# Altium PCB board.PcbDoc
Units mil, origin at the board's own origin, x right, y up, seen from the top; angles counter-clockwise.
Board outline 2240 x 2705 mil, 2 copper layers (Top Layer, Bottom Layer); 2 components, 24 nets, 86 pads, 22 vias.
Unrouted connection lines stored in the file: 30.
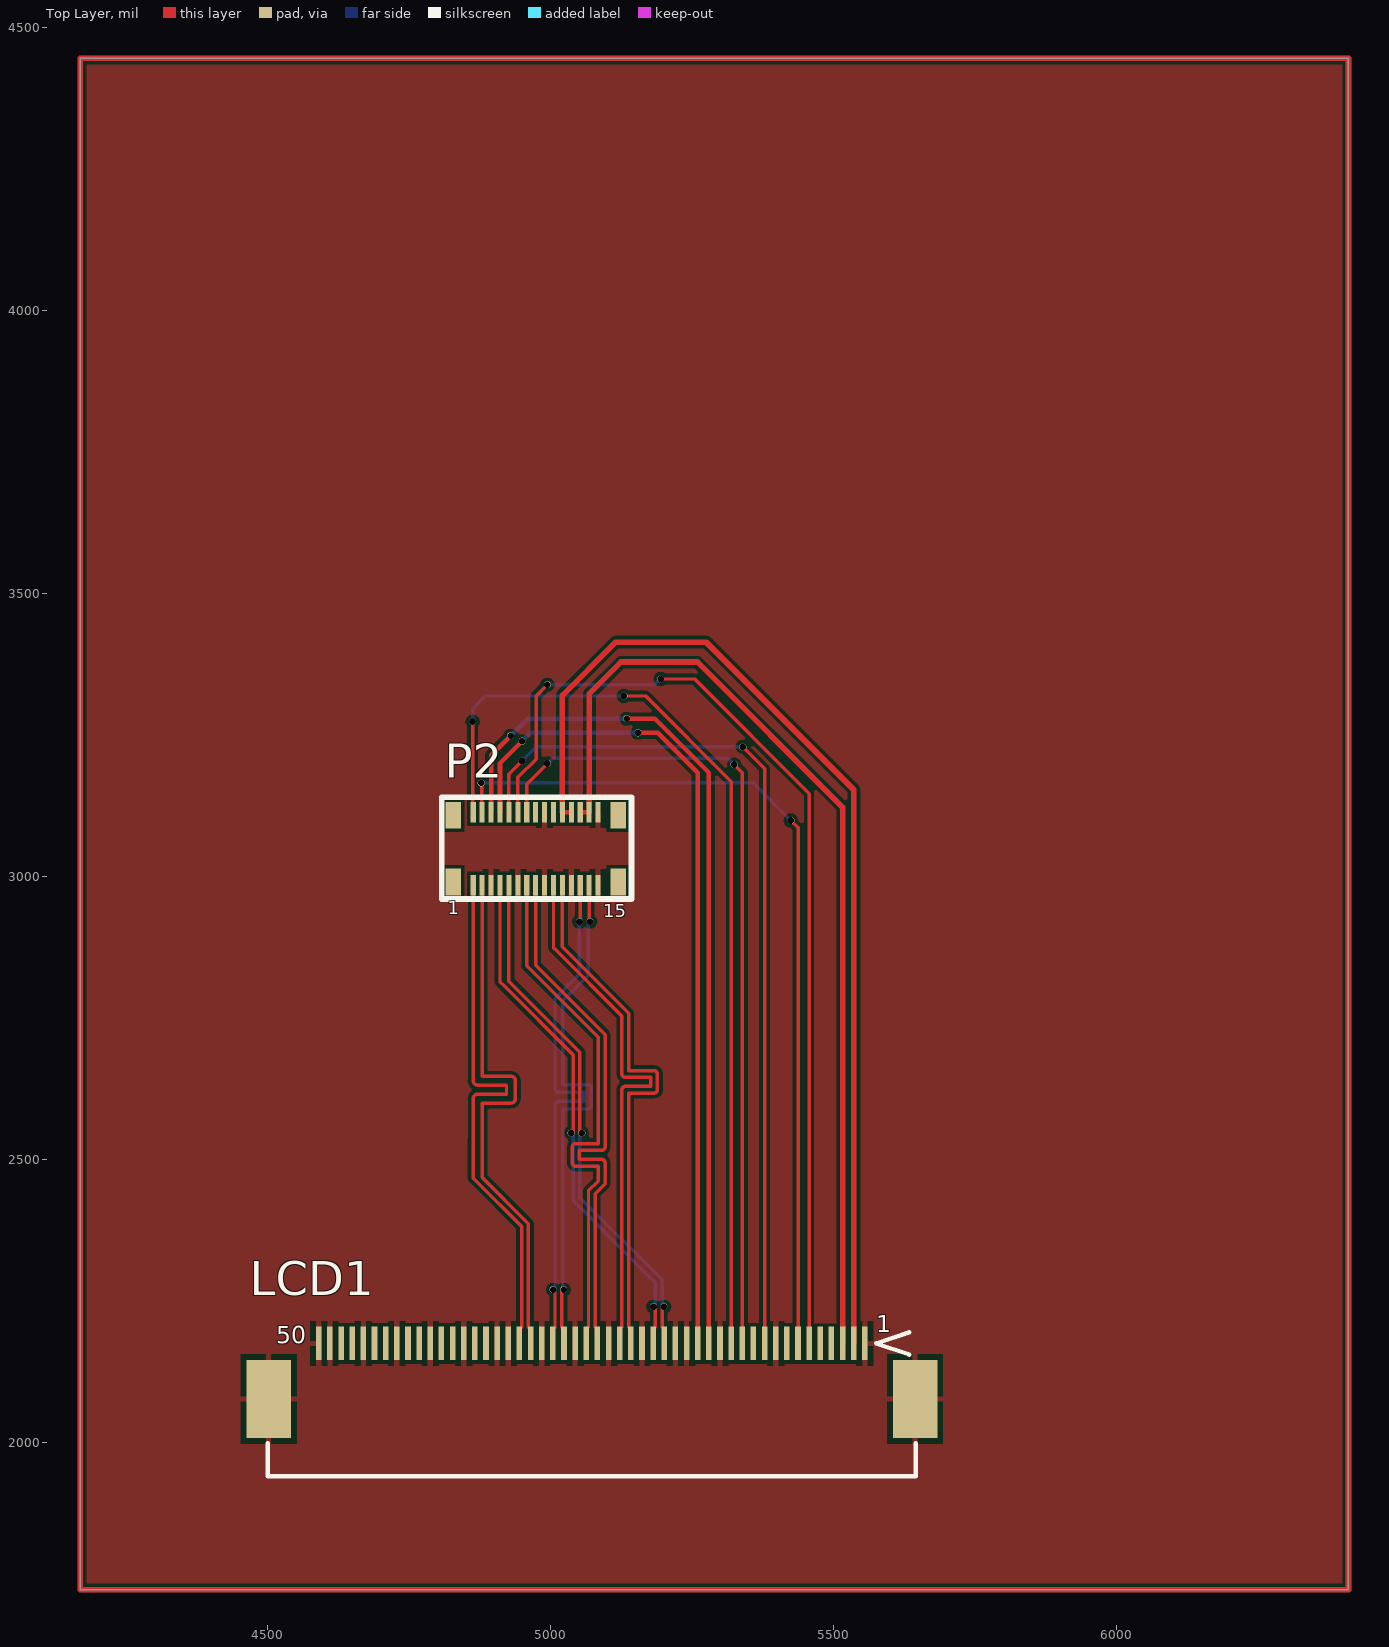
[diagram p0: Top Layer view]
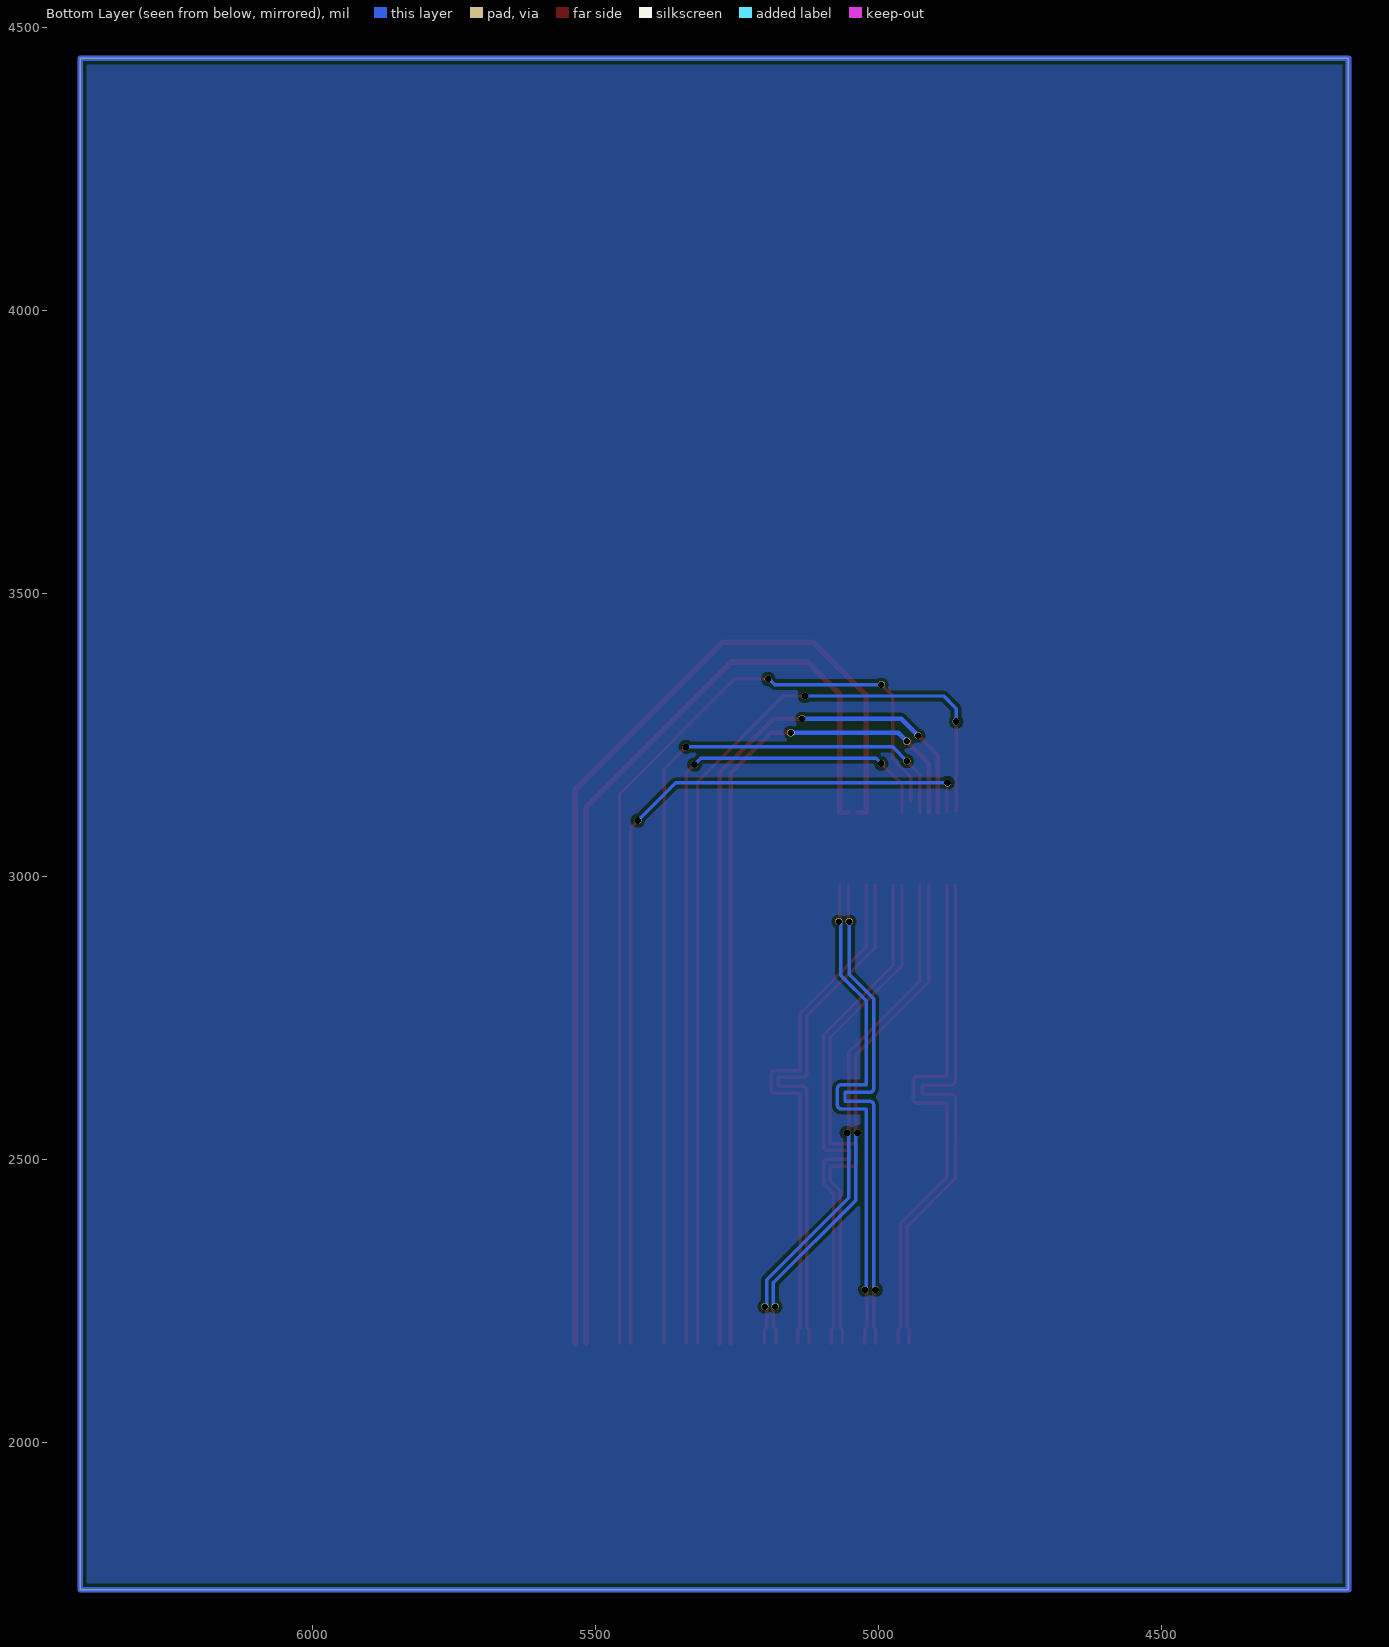
[diagram p1: Bottom Layer view, seen from below]

## Layer stack, top to bottom
Top Solder: solder mask 0.4, Solder Resist, Dk 3.5
Top Layer: signal copper 1.4
Dielectric 1: dielectric 12.6, FR-4, Dk 4.8
Bottom Layer: signal copper 1.4
Bottom Solder: solder mask 0.4, Solder Resist, Dk 3.5

## Board outline
4170,1740 4170,4445 6410,4445 6410,1740

## Design rules (kind name [scope] priority, off if disabled: settings)
Clearance [All] p1: gap=6 ignorepadtopadclearanceinfootprint=FALSE
DiffPairsRouting DiffPairsRouting_1 [InDifferentialPair ('MIPI_CLK')] p1: maxlimit=10 minlimit=6 mostfreqgap=6 toplayer_minwidth=6 toplayer_maxwidth=15 toplayer_prefwidth=6 bottomlayer_minwidth=6 bottomlayer_maxwidth=15 bottomlayer_prefwidth=6 maxuncoupledlength=500
DiffPairsRouting [All] p2: maxlimit=10 minlimit=6 mostfreqgap=6 toplayer_minwidth=6 toplayer_maxwidth=15 toplayer_prefwidth=6 bottomlayer_minwidth=6 bottomlayer_maxwidth=15 bottomlayer_prefwidth=6 maxuncoupledlength=500
HoleToHoleClearance [All] p1: gap=6 allowstackedmicrovias=TRUE
MatchedLengths [InDifferentialPair ('MIPI_CLK')] p1: tolerance=1000 checknetsindiffpair=FALSE checkdiffpairvsdiffpair=TRUE checkxsignals=TRUE checkothers=TRUE
MinimumSolderMaskSliver [All] p1: minsoldermaskwidth=0
PolygonConnect [All] p1: connectstyle=Relief reliefconductorwidth=10 reliefentries=4 polygonreliefangle="90 Angle" airgapwidth=10
RoutingVias [All] p1: holewidth=11.81 width=12.6 viastyle="Through Hole" minholewidth=11.81 minwidth=12.6 maxholewidth=13.78 maxwidth=13.78
SilkToSilkClearance [All] p1: silktosilkclearance=0
SilkToSolderMaskClearance [IsPad] p1: minsilkscreentomaskgap=0 clearancetoexposedcopper=TRUE
SolderMaskExpansion [All] p1: expansion=4
Width [All] p1: maxlimit=10 minlimit=6 preferedwidth=6
25 further rules are at their usual default settings.

## Classes and differential pairs
differential pair MIPI_D1: +MIPI_D1_P -MIPI_D1_N
differential pair MIPI_D2: +MIPI_D2_P -MIPI_D2_N
differential pair MIPI_D3: +MIPI_D3_P -MIPI_D3_N
differential pair MIPI_D0: +MIPI_D0_P -MIPI_D0_N
differential pair MIPI_CLK: +MIPI_CLK_P -MIPI_CLK_N

## Components (designator, comment, footprint, x,y, rotation, side; value= is the part's Value field where it differs from the comment)
LCD1 "AT070TN92" FPC-TOP50 5555.87,2175 r180 top
P2 "Header 15X2A" FPC30-0.3 4828.66,2990 r0 top

## Footprints (in the part's own frame and the unit in brackets; to place one, negate y for a bottom-side part, rotate by r counter-clockwise, add the part's x,y. Pads: shape width x height; smd on the part's side, far side on the other; paste and mask are expansions set on the pad)
FPC30-0.3 [mm]
  rect 0.7x1.2 smd: 0(0,0) 0(0,3) 0(7.4,0) 0(7.4,3)
  rect 0.23x0.92 smd: 1(0.9,-0.14) 2(1.3,-0.14) 3(1.7,-0.14) 4(2.1,-0.14) 5(2.5,-0.14) 6(2.9,-0.14) 7(3.3,-0.14) 8(3.7,-0.14) 9(4.1,-0.14) 10(4.5,-0.14) 11(4.9,-0.14) 12(5.3,-0.14) 13(5.7,-0.14) 14(6.1,-0.14) 15(6.5,-0.14) 16(6.5,3.14) 17(6.1,3.14) 18(5.7,3.14) 19(5.3,3.14) 20(4.9,3.14) 21(4.5,3.14) 22(4.1,3.14) 23(3.7,3.14) 24(3.3,3.14) 25(2.9,3.14) 26(2.5,3.14) 27(2.1,3.14) 28(1.7,3.14) 29(1.3,3.14) 30(0.9,3.14)
  silkscreen extent -0.51,-0.76 8,3.81
FPC-TOP50 [mm]
  rect 0.25x1.5 smd: 1(0,0) 2(0.5,0) 3(1,0) 4(1.5,0) 5(2,0) 6(2.5,0) 7(3,0) 8(3.5,0) 9(4,0) 10(4.5,0) 11(5,0) 12(5.5,0) 13(6,0) 14(6.5,0) 15(7,0) 16(7.5,0) 17(8,0) 18(8.5,0) 19(9,0) 20(9.5,0) 21(10,0) 22(10.5,0) 23(11,0) 24(11.5,0) 25(12,0) 26(12.5,0) 27(13,0) 28(13.5,0) 29(14,0) 30(14.5,0) 31(15,0) 32(15.5,0) 33(16,0) 34(16.5,0) 35(17,0) 36(17.5,0) 37(18,0) 38(18.5,0) 39(19,0) 40(19.5,0) 41(20,0) 42(20.5,0) 43(21,0) 44(21.5,0) 45(22,0) 46(22.5,0) 47(23,0) 48(23.5,0) 49(24,0) 50(24.5,0)
  rect 2x3.5 smd: A(-2.25,2.5) B(26.75,2.5)
  silkscreen extent -2.29,-0.5 26.8,5.97

## Part data
P2: "Header, 15-Pin, Dual row", LatestRevisionDate=17-Jul-2002, LatestRevisionNote="Re-released for DXP Platform.", Publisher="Altium Limited"

## Via types
v1: diameter 12.6, hole 11.81, Top Layer to Bottom Layer, 22 vias

## Nets (pads, with @x,y where several pads share a name; then routed paths per layer and width w, separated by ;. In a path a pad name is that pad's centre, name@x,y a point inside that pad or via, vN(x,y) a via of type N, cw(c..) or ccw(c..) an arc to the next point about the centre after c; other vN are vias at no path point)
AVDD: LCD1.16 P2.27 | length 1496.4
  Top Layer w8: P2.27 4911.34,3199.88 v1(4950.08,3238.62) ; v1(5155.08,3253.62) 5190.08,3253.62 5260.67,3183.03 LCD1.16@5260.67,2175
  Bottom Layer w8: v1(4950.08,3238.62) 4965.08,3253.62 v1(5155.08,3253.62) v1@5155.96,3252.74
AVEE: LCD1.15 P2.28 | length 1559.8
  Top Layer w8: P2.28 4895.59,3214.13 v1(4930.08,3248.62) ; v1(5135.08,3278.62) 5185.08,3278.62 5280.35,3183.35 LCD1.15@5280.35,2175
  Bottom Layer w8: v1(4930.08,3248.62) 4960.08,3278.62 v1(5135.08,3278.62)
GND: LCD1.1 LCD1.9 LCD1.14 LCD1.17 LCD1.18 LCD1.21 LCD1.24 LCD1.27 LCD1.30 LCD1.33 LCD1.34 LCD1.37 LCD1.40 LCD1.43 LCD1.46 LCD1.49 LCD1.50 LCD1.A LCD1.B P2.3 P2.6 P2.9 P2.12 P2.15 P2.16 P2.22
LCD_ID: LCD1.11
LCD_IN2: LCD1.4
LCD_OUT2: LCD1.6 P2.25 | length 1748.3
  Top Layer w6: 4942.83,3133.62 4942.83,3174.74 4975.08,3206.99 4975.08,3318.62 v1(4995.08,3338.62) ; v1(5195.08,3348.62) 5255.08,3348.62 5457.52,3146.18 LCD1.6@5457.52,2175
  Bottom Layer w6: v1(4995.08,3338.62) 5183.44,3338.62 5193.44,3348.62 v1(5195.08,3348.62)
LCD_PWM: LCD1.7 P2.29 | length 1554.3
  Top Layer w6: v1(4878.31,3165.16) 4879.08,3164.4 P2.29@4879.08,3114.39 ; v1(5425.08,3098.62) 5437.83,3085.87 LCD1.7
  Bottom Layer w6: v1(4878.31,3165.16) 5358.54,3165.16 v1(5425.08,3098.62)
LCD_RST: LCD1.13 P2.30 | length 1702.6
  Top Layer w6: P2.30@4862.88,3114.83 v1(4862.88,3273.42) ; v1(5130.08,3318.62) 5168.44,3318.62 5319.72,3167.34 LCD1.13@5319.72,2175
  Bottom Layer w6: v1(4862.88,3273.42) 4862.88,3296.43 4885.08,3318.62 v1(5130.08,3318.62)
LCD_TE: LCD1.12 P2.24 | length 1467.7
  Top Layer w6: P2.24 4958.58,3162.77 v1(4995.08,3199.26) ; v1(5325.08,3197.49) 5339.41,3183.16 LCD1.12@5339.41,2175
  Bottom Layer w6: v1(4995.08,3199.26) 5004.44,3208.62 5313.95,3208.62 v1(5325.08,3197.49)
LEDA: LCD1.3 P2.17 P2.18 | length 1748.9
  Top Layer w8: P2.18 P2.17
  Top Layer w10: P2.17 5068.82,3322.33 5125.11,3378.62 5260.08,3378.62 5516.57,3122.13 LCD1.3@5516.57,2175
LEDK: LCD1.2 P2.19 P2.20 | length 1861.4
  Top Layer w8: P2.20 P2.19
  Top Layer w10: P2.20 5021.57,3319.57 5115.62,3413.62 5275.75,3413.62 5536.26,3153.11 LCD1.2@5536.26,2175
M_IO_VDD: LCD1.10 P2.26 | length 1569.5
  Top Layer w6: P2.26 4927.09,3180.63 v1(4950.08,3203.62) ; v1(5340.08,3228.62) 5378.78,3189.92 LCD1.10@5378.78,2175
  Bottom Layer w6: v1(4950.08,3203.62) 4975.08,3228.62 v1(5340.08,3228.62)
M_VDD: LCD1.8
MIPI_CLK_N: LCD1.26 P2.7 | length 957.4
  Top Layer w6: P2.7 4958.58,2841.96 4965.85,2834.7 5085,2715.54 5085,2528 5045.03,2528 ccw(c5045.03,2522) 5039.03,2522 5039.03,2494 ccw(c5045.03,2494) 5045.03,2488 5085,2488 5085,2461.83 5067.58,2444.41 5067.58,2203.45 5063.74,2199.61 LCD1.26
MIPI_CLK_P: LCD1.25 P2.8 | length 955.9
  Top Layer w6: P2.8 4974.33,2843.18 5097,2720.51 5097,2522 cw(c5091,2522) 5091,2516 5051.03,2516 5051.03,2500 5091,2500 cw(c5091,2494) 5097,2494 5097,2456.86 5079.58,2439.44 5079.58,2203.45 5083.43,2199.61 LCD1.25
MIPI_D0_N: LCD1.20 P2.4 | length 930.2
  Top Layer w6: P2.4 4911.34,2967.85 4911.26,2813.74 4918.52,2806.48 5040.54,2684.46 5040.54,2550.08 v1(5037.24,2546.79) ; LCD1.20 5181.85,2199.61 5185.69,2203.45 5185.69,2236.7 v1(5182.39,2240)
  Bottom Layer w6: v1(5037.24,2546.79) 5040.54,2543.49 5040.54,2427.49 5185.69,2282.34 5185.69,2243.3 v1(5182.39,2240)
MIPI_D0_P: LCD1.19 P2.5 | length 928.7
  Top Layer w6: P2.5 4927.09,2967.85 4927.01,2814.96 5052.54,2689.43 5052.54,2550.08 v1(5055.84,2546.79) ; v1(5200.99,2240) 5197.69,2236.7 5197.69,2203.45 5201.54,2199.61 LCD1.19
  Bottom Layer w6: v1(5055.84,2546.79) 5052.54,2543.49 5052.54,2432.46 5197.69,2287.31 5197.69,2243.3 v1(5200.99,2240)
MIPI_D1_N: LCD1.23 P2.10 | length 957.4
  Top Layer w6: P2.10 5005.83,2874.17 5013.09,2866.91 5126.64,2753.36 5126.64,2651 ccw(c5132.64,2651) 5132.64,2645 5177.37,2645 5177.37,2629 5132.64,2629 ccw(c5132.64,2623) 5126.64,2623 5126.64,2203.45 5122.8,2199.61 LCD1.23
MIPI_D1_P: LCD1.22 P2.11 | length 955.9
  Top Layer w6: P2.11 5021.57,2875.4 5138.64,2758.33 5138.64,2657 5183.37,2657 cw(c5183.37,2651) 5189.37,2651 5189.37,2623 cw(c5183.37,2623) 5183.37,2617 5138.64,2617 5138.64,2203.45 5142.48,2199.61 LCD1.22
MIPI_D2_N: LCD1.29 P2.13 | length 927.9
  Top Layer w6: LCD1.29 5004.69,2199.61 5008.53,2203.45 5008.53,2266.7 v1(5005.23,2270) ; v1(5051.65,2920) 5053.07,2921.43 P2.13
  Bottom Layer w6: v1(5005.23,2270) 5008.53,2273.3 5008.53,2595.87 cw(c5015.24,2595.87) 5015.24,2602.58 5059.23,2602.58 5059.23,2618.58 5015.24,2618.58 cw(c5015.24,2625.29) 5008.53,2625.29 5008.53,2783.9 5051.65,2827.02 v1(5051.65,2920)
MIPI_D2_P: LCD1.28 P2.14 | length 929.4
  Top Layer w6: v1(5023.83,2270) 5020.53,2266.7 5020.53,2203.45 5024.37,2199.61 LCD1.28 ; P2.14 5068.82,2921.43 v1(5070.24,2920)
  Bottom Layer w6: v1(5023.83,2270) 5021.94,2271.88 5021.94,2589.17 5065.94,2589.17 ccw(c5065.94,2595.87) 5072.65,2595.87 5072.65,2625.29 ccw(c5065.94,2625.29) 5065.94,2632 5021.94,2632 5021.94,2780.35 5060.13,2818.54 5066.87,2825.27 5066.87,2826.87 ; 5066.94,2826.87 5066.94,2916.7 v1(5070.24,2920)
MIPI_D3_N: LCD1.32 P2.1 | length 957.4
  Top Layer w6: P2.1 4864.04,2639.13 ccw(c4871.91,2639.13) 4871.9,2631.26 4922.87,2631.25 4922.87,2615.25 4871.9,2615.26 ccw(c4871.9,2607.39) 4864.03,2607.39 4863.9,2467.08 4871.36,2459.63 4949.47,2381.52 4949.47,2203.45 4945.63,2199.61 LCD1.32
MIPI_D3_P: LCD1.31 P2.2 | length 955.8
  Top Layer w6: P2.2 4879.78,2647 4930.75,2646.99 cw(c4930.74,2639.12) 4938.62,2639.12 4938.61,2607.37 cw(c4930.74,2607.37) 4930.74,2599.5 4879.77,2599.51 4879.84,2468.12 4961.47,2386.49 4961.47,2203.45 4965.31,2199.61 LCD1.31
V3.3: LCD1.5
pads on no net: LCD1.35 LCD1.36 LCD1.38 LCD1.39 LCD1.41 LCD1.42 LCD1.44 LCD1.45 LCD1.47 LCD1.48 P2.0 P2.21 P2.23

## Polygon pours and split planes (outlines as drawn)
GND on Bottom Layer (solid, pour order 10): 4170,4445 6410,4445 6410,1750 6400,1740 4170,1740
GND on Top Layer (solid, pour order 12): 4170,4445 6410,4445 6410,1740 4170,1740

## Other copper
Multi-Layer:
  the board outline again, w10

## Text inside footprints (layer, text, board x,y; h text height)
LCD1: Top Overlay "50" at 4515.87,2175 h30; Top Overlay "1" at 5575.87,2195 h30
P2: Top Overlay "1" at 4818.66,2925 h40; Top Overlay "15" at 5093.66,2920 h40